# Altium PCB MX3.PcbDoc
Units mil, origin at the board's own origin, x right, y up, seen from the top; angles counter-clockwise.
Board outline 1580 x 835 mil, 2 copper layers (Top Layer, Bottom Layer), stack 12.8 mil thick; 39 components, 24 nets, 110 pads, 73 vias.
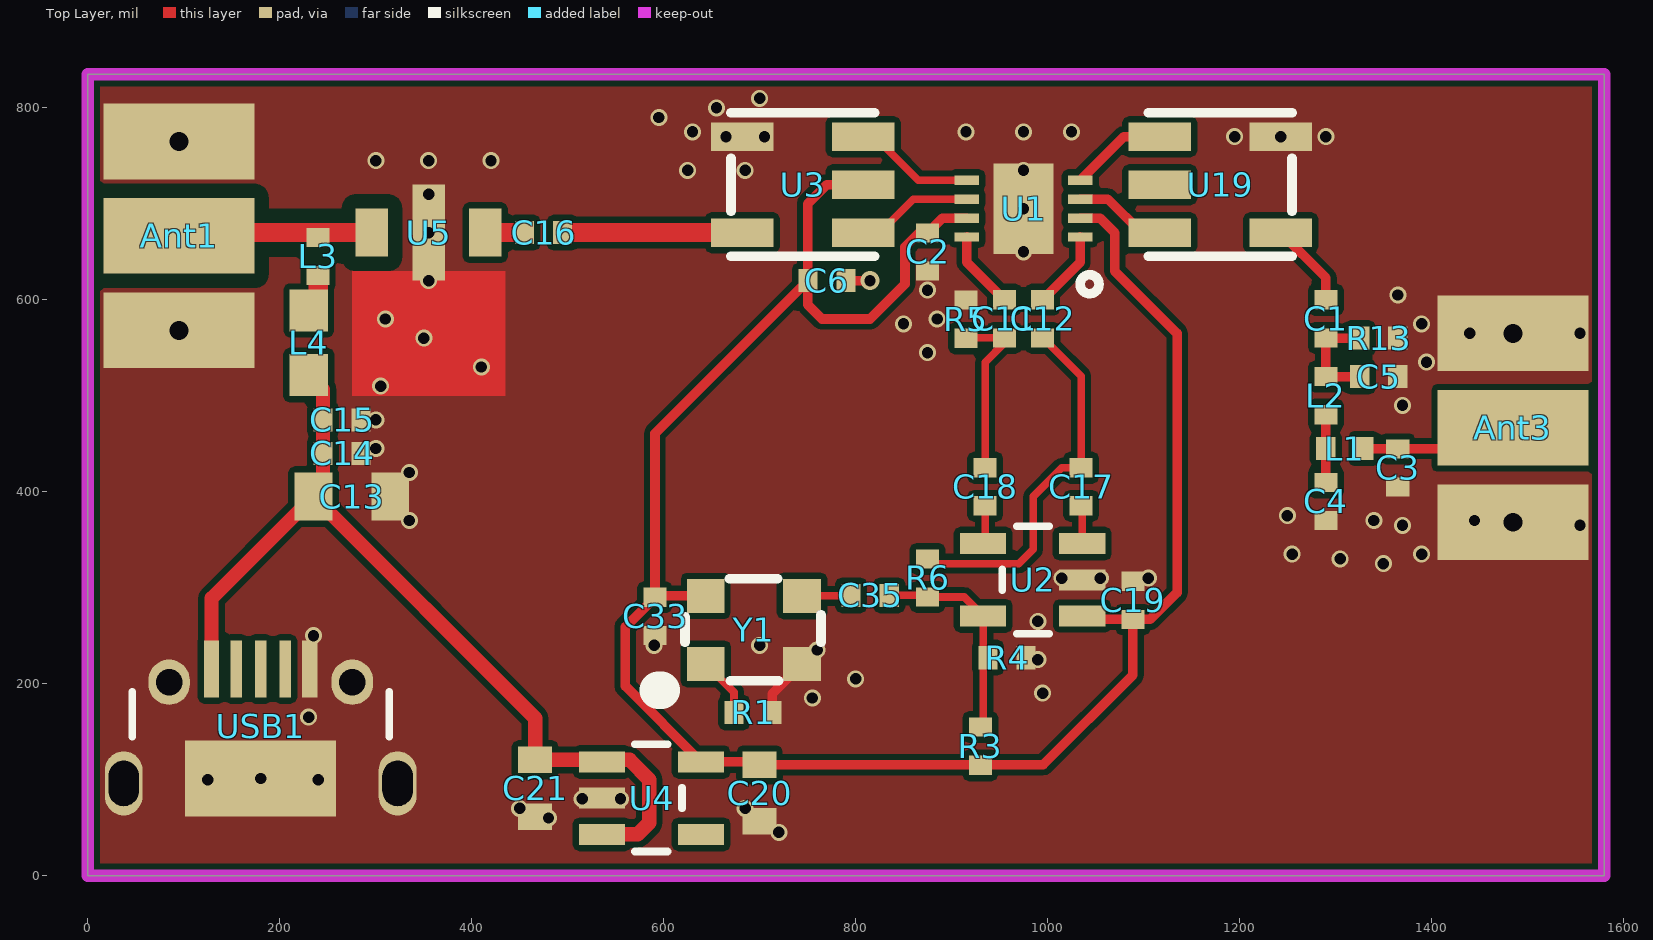
[diagram p0: Top Layer view]
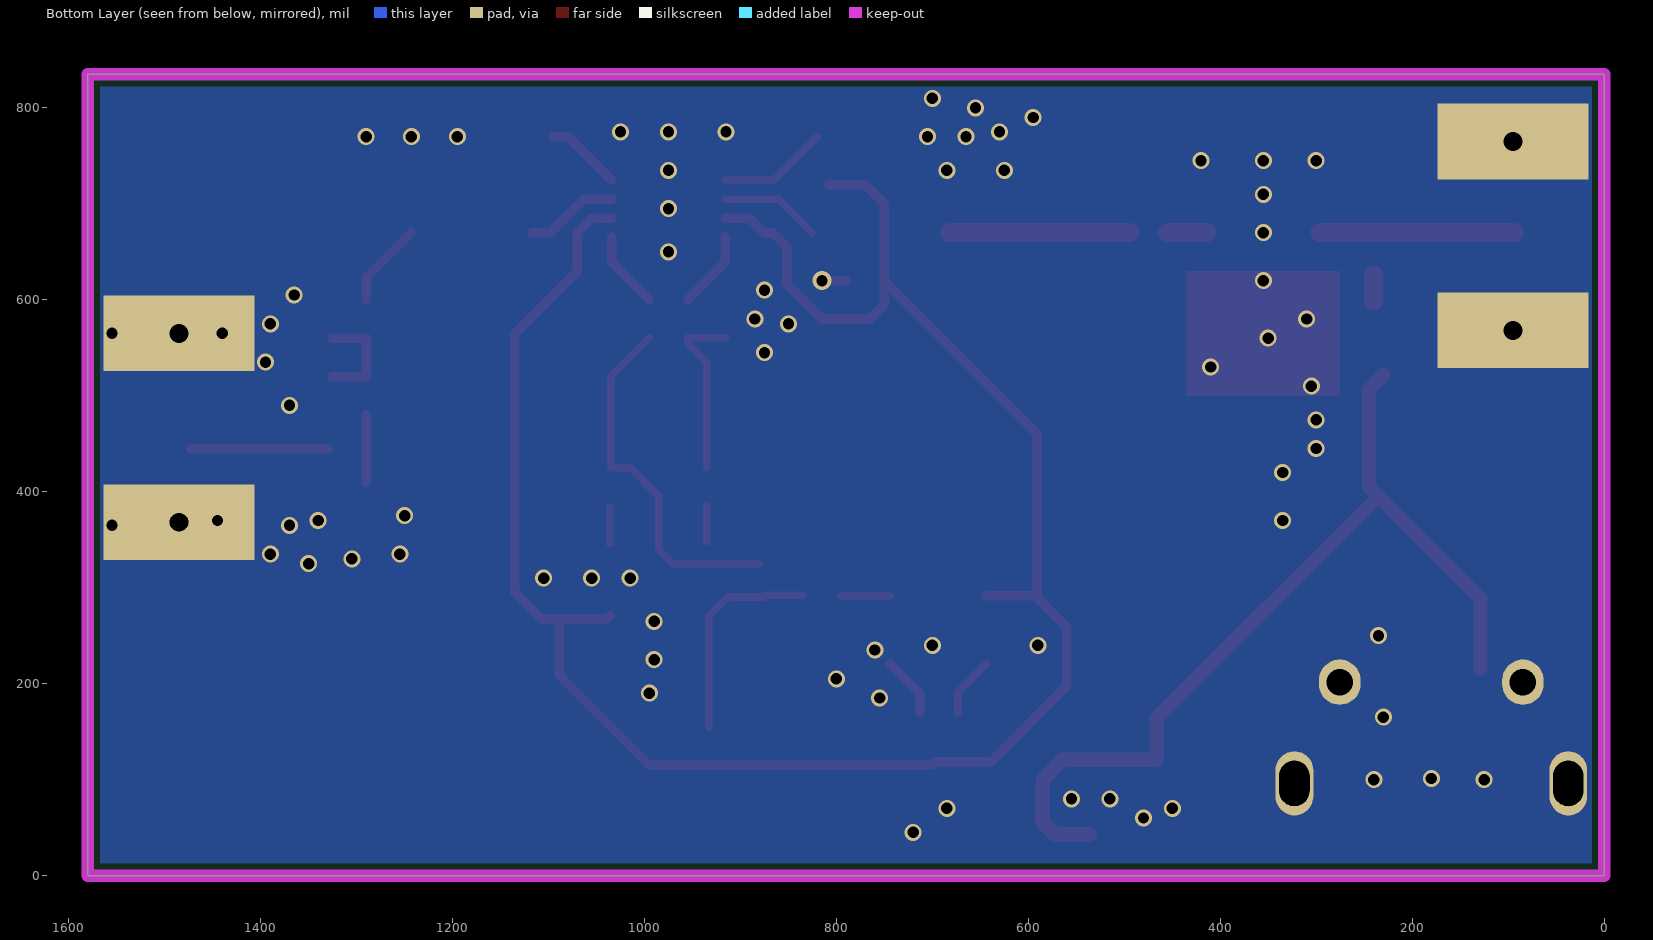
[diagram p1: Bottom Layer view, seen from below]

## Layer stack, top to bottom
Top Solder: solder mask 0.4, Solder Resist, Dk 3.8
Top Layer: signal copper 1.4
Dielectric 1: core 10, Dk 4.2
Bottom Layer: signal copper 1.4
Bottom Solder: solder mask 0.4, Solder Resist, Dk 3.8

## Board outline
0,0 0,835 1580,835 1580,0

## Design rules (kind name [scope] priority, off if disabled: settings)
Clearance 50R [InNetClass('50R') vs InPolygon] p1: gap=15 ignorepadtopadclearanceinfootprint=FALSE
Clearance [All] p2: gap=6 ignorepadtopadclearanceinfootprint=FALSE except(0: Arc-Hole Track-Hole SMDPad-Hole THPad-Hole Via-Hole Fill-Hole Poly-Hole Region-Hole Text-Hole)
DiffPairsRouting [All] p1: maxlimit=10 minlimit=10 mostfreqgap=10 toplayer_minwidth=5.98 toplayer_maxwidth=15 toplayer_prefwidth=15 bottomlayer_minwidth=5.98 bottomlayer_maxwidth=15 bottomlayer_prefwidth=15 maxuncoupledlength=500
MinimumSolderMaskSliver [All] p1 off: minsoldermaskwidth=10
PlaneClearance [All] p1: clearance=15
PlaneConnect [All] p1: planeconnectstyle=Direct reliefexpansion=20 reliefentries=4 reliefconductorwidth=10 reliefairgap=10
PolygonConnect [All] p1: connectstyle=Direct reliefconductorwidth=10 reliefentries=4 polygonreliefangle="90 Angle" airgapwidth=10
RoomDefinition MX [InComponentClass('MX')] p1 off: confinementstyle=ConfineIn formatcopy=TRUE lockcomponents=FALSE outline 1399.04,1282.09 10549.04,1282.09 10549.04,1632.09 1399.04,1632.09
RoutingVias [All] p1: holewidth=12 width=20 viastyle="Through Hole" minholewidth=11.81 minwidth=19.68 maxholewidth=28 maxwidth=50
SilkToBoardRegionClearance [All] p1 off:
SilkToSilkClearance [All] p1 off: silktosilkclearance=10
SilkToSolderMaskClearance [IsPad] p1 off: minsilkscreentomaskgap=10 clearancetoexposedcopper=TRUE
SolderMaskExpansion [All] p1: expansion=4
Width [All] p1: maxlimit=60 minlimit=6 preferedwidth=6
23 further rules are at their usual default settings.

## Classes and differential pairs
net class 50R: NetAnt1_1

## Components (designator, comment, footprint, x,y, rotation, side; value= is the part's Value field where it differs from the comment)
Ant1 "Antenna" SMA 95,765 r270 top
Ant3 "Antenna" SMA 1485,565 r270 top
C1 "100pF" 0402 1290,580 r90 top
C2 "100pF" 0402 875,650 r270 top
C3 "100pF" 0402 1365,425 r270 top
C4 "100pF" 0402 1290,390 r270 top
C5 "100pF" 0402 1345,520 r0 top
C6 "100pF" 0402 770,620 r0 top
C11 "1nF" 0402 955,580 r90 top
C12 "1nF" 0402 995,580 r90 top
C13 "12nF" 0805 275,395 r180 top
C14 "1nF" 0402 265,440 r180 top
C15 "100pF" 0402 265,475 r180 top
C16 "1nF" 0402 475,670 r180 top
C17 "1nF" 0402 1035,405 r90 top
C18 "1nF" 0402 935,405 r90 top
C19 "0.1uF" 0402 1089,287 r270 top
C20 "4.7uF" 0603L 700,86 r90 top
C21 "4.7uF" 0603L 466,91 r90 top
C33 "0.1uF" 0402 591,270 r90 top
C35 "0.1uF" 0402 815,292 r0 top
L1 "Inductor" 0402 1310,445 r180 top value=10nH
L2 "Inductor" 0402 1290,500 r90 top value=10nH
L3 "Inductor" 0402 240,645 r90 top value=10nH
L4 "Inductor" 0603 230,555 r90 top value=10nH
R1 "NC" 0402 693,170 r0 top
R3 "10k" 0402 930,135 r270 top
R4 "10k" 0402 958,227 r180 top
R5 "0R/NC" 0402 915,580 r270 top
R6 "NC" 0402 875,310 r90 top
R13 "NC" 0402 1345,560 r0 top
U1 "LT5560" LT5560 975,695 r180 top
U2 "SN65LVDS1" SOT23-5 985,308 r90 top
U3 "TCM1-13MX+" TCM-13M+ 745,720 r270 top
U4 "LP5907" SOT23-5 587,81 r270 top
U5 "AMP-SOT89" SOT-89 355,670 r180 top
U19 "TCM1-13MX+" TCM-13M+ 1180,720 r90 top
USB1 "USB Micro Type B" MICRO-YZX 180,-15 r0 top
Y1 "OSC_40M" TXC_7Q 694.04,256.09 r0 top

## Footprints (in the part's own frame and the unit in brackets; to place one, negate y for a bottom-side part, rotate by r counter-clockwise, add the part's x,y. Pads: shape width x height; smd on the part's side, far side on the other; paste and mask are expansions set on the pad)
0402 [mil] "0402-RES"
  rect 20x24 smd: 1(-19.68,0) 2(20,0)
0603 [mil] "0603-RES"
  rect 44x40 smd: 1(-33.46,0) 2(34,0)
  body extent -31,-16 31,16, height 31
0603L [mm]
  rect 0.7x0.9 smd: 1(-0.75,0) 2(0.75,0)
  body extent -0.8,-0.4 0.8,0.4, height 0.8
0805 [mil]
  rect 39.37x50 smd: 1(-40,0) 2(40,0)
  body extent -50,-30 50,30, height 31
LT5560 [mm]
  rect 1.6x2.4 smd: 0(0,0)
  rect 0.65x0.25 smd: 1(-1.5,0.75) 2(-1.5,0.25) 3(-1.5,-0.25) 4(-1.5,-0.75) 5(1.5,-0.75) 6(1.5,-0.25) 7(1.5,0.25) 8(1.5,0.75)
  silkscreen extent -2,1.75 -1.5,2.25, body extent -1.5,-1.5 1.5,1.5, height 0.75
MICRO-YZX [mm]
  rect 0.4x1.5 smd: 1(-1.3,5.85) 5(1.3,5.85)
  rect 0.3x1.5 smd: 2(-0.65,5.85) 3(0,5.85) 4(0.65,5.85)
  oval 1x1.7 hole 0.8 slot 1.2 at 90 deg: 5(-3.625,2.82) 5(3.625,2.82)
  oval 1.1x1.2 hole 0.7: 5(-2.425,5.5) 5(2.425,5.5)
  rect 4x2 smd: 5(0,2.95)
  silkscreen extent -3.4,4.05 3.4,5.25, body extent -4.02,0.33 3.98,5.93, height 2.6
SMA [mm]
  rect 2x4 smd: 1(2.5,0)
  rect 2x4 hole 0.5: GND(0,0) GND(5,0)
SOT23-5 [mil] "SOT23-5"
  rect 22x48 smd: 1(-37.4,-51.19) 2(0,-51.19) 3(38,-51.19) 4(38,52) 5(-37.4,52)
  silkscreen extent -56,-17 56,32, body extent -57,-55 57,55, height 47
SOT-89 [mil]
  rect 34x50 smd: 1(-59.06,0) 3(59.06,0)
  rect 34x100 smd: 2(0,0)
  Top Layer region: -80,40 80,40 80,170 -80,170
  body extent -89,-22 89,147, height 59
TCM-13M+ [mm]
  rect 0.75x1.65 smd: 1(-1.27,1.6) 2(0,1.6) 3(1.27,1.6) 4(1.27,-1.6) 5(-1.27,-1.6)
  silkscreen extent -1.9,-1.9 1.9,1.9
TXC_7Q [mm]
  rect 1x0.9 smd: 1(-1.275,-0.9) 2(1.275,-0.9) 3(1.275,0.9) 4(-1.275,0.9)
  silkscreen extent -2.52,-1.6 1.78,1.35

## Part data
C1 C2 C3 C4 C5 C6 C11 C12 C13 C14 C15 C16 C17 C18 C19 C33 C35: library part CAP0402-CAP, "<b>Capacitor</b> / Standard 0603 ceramic capacitor, and 0.1\" leaded capacitor.", PARTNO=CC0402ZRY5V7BB104
C20 C21: library part Cap, "Capacitor", LatestRevisionDate=17-Jul-2002, LatestRevisionNote="Re-released for DXP Platform.", PackageDescription="Radial Cap, Thru-Hole; 2 Leads; 0.3 in Pin Spacing", PackageReference=RAD-0.3, Published=8-Jun-2000, Publisher="Altium Limited"
R1 R3 R4 R5 R6 R13: library part Res2, "Resistor", LatestRevisionDate=17-Jul-2002, LatestRevisionNote="Re-released for DXP Platform.", PackageDescription="Axial Device, Thru-Hole; 2 Leads; 0.4 in Pin Spacing", PackageReference=AXIAL-0.4, Published=8-Jun-2000, Publisher="Altium Limited"
U3 U19: library part TCM-63AX+
USB1: library part USB_Micro_TypeB, "Connector SMD USB Micro Type B middle mount", Manufacturer 1="Molex Inc", Manufacturer Part Number 1=47491-0001, Package / Case=SMD, Supplier Part Number 1=WM17142CT-ND, SCDType=undef, Supplier 1=Digi-Key
L1 L2 L3 L4: Code_IEC=1005, Code_JEITA=0402, LatestRevisionDate=29-May-2009, LatestRevisionNote="IPC-7351 Footprint Added.", PackageDescription="Chip Inductor", PackageReference=0402-A, Published=8-Jun-2000, Publisher="Altium Limited"

## Via types
v1: diameter 17.72, hole 11.81, Top Layer to Bottom Layer, 72 vias
v2: diameter 19.68, hole 11.81, Top Layer to Bottom Layer, 1 vias

## Nets (pads, with @x,y where several pads share a name; then routed paths per layer and width w, separated by ;. In a path a pad name is that pad's centre, name@x,y a point inside that pad or via, vN(x,y) a via of type N, cw(c..) or ccw(c..) an arc to the next point about the centre after c; other vN are vias at no path point)
3.3: C2.1 C6.1 C19.2 C20.2 C33.2 R3.2 U1.2 U1.7 U2.1 U3.2 U4.5 Y1.4 | length 2175.8
  Top Layer w10: Y1.4 592.52,291.52 C33.2 ; C20.2@697.13,118.4 U4.5 560,197.4 560,259 C33.2 ; C20.2 995.53,115.53 1089,209 C19.2 ; U3.2 770,720 750.32,700.32 C6.1 ; U1.7 890.47,685.16 C2.1 866.16,669.68 851.47,655 851.47,616.47 815,580 765,580 750.32,594.68 C6.1 ; U1.2 1054.84,685.16 1070,670 1070,630 1135,565 1135,295 1107,267 C19.2 ; U2.1 1039.78,267 C19.2 ; C33.2 591,460.68 C6.1
5V: C13.2 C14.2 C15.2 C21.2 L4.1 U4.1 U4.3 USB1.1 | length 957.4
  Top Layer w15: USB1.1 128.82,288.82 C13.2 ; L4.1 245,506.54 C15.2 C14.2 245,405 C13.2 ; U4.3 573,43 585,55 585,100 564.47,120.53 C21.2 466,164 C13.2
GND: Ant1.GND Ant3.GND C2.2 C3.2 C4.2 C5.2 C6.2 C13.1 C14.1 C15.1 C19.1 C20.1 C21.1 C33.1 R1.2 R4.1 R5.1 R13.2 U1.0 U2.2 U3.5 U4.2 U5.2 U19.4 USB1.5 Y1.2 | length 88.6
  Top Layer w10: R1.2 713,189.42 Y1.2 ; C6.2 v2(815,620)
  other v1: 720,45 480,60 450,70 685,70 515,80 555,80 125,100 240,100 180,101.14 230,165 755,185 995,190 800,205 990,225 760,235 590,240 700,240 235,250 990,265 1015,310 1055,310 1105,310 1350,325 1305,330 1255,335 1390,335 1370,365 1555,365 335,370 1340,370 1445,370 1250,375 335,420 300,445 300,475 1370,490 305,510 410,530 1395,535 875,545 350,560 1440,565 1555,565 850,575 1390,575 310,580 885,580 1365,605 875,610 355,620 975,650 355,670 975,695 355,710 625,735 685,735 975,735 300,745 355,745 420,745 665,770 705,770 1195,770 1242.99,770 1290,770 630,775 915,775 975,775 1025,775 595,790 655,800 700,810
LO_N: C11.2 U1.8 | length 81.6
  Top Layer w10: U1.8 915.94,639.06 C11.2
LO_P: C12.2 U1.1 | length 81.6
  Top Layer w10: C12.2 1034.06,639.06 U1.1
NetAnt1_1: Ant1.1 L3.2 U5.3 | length 202.5
  Top Layer w20: Ant1.1@93.43,670 U5.3
NetAnt3_1: Ant3.1 C3.1 L1.1 | length 143.7
  Top Layer w10: L1.1 Ant3.1@1473.43,445
NetC1_1: C1.1 C5.1 L2.2 R13.1 | length 110.6
  Top Layer w10: C1.1 L2.2 C5.1 ; C1.1@1290.32,560 R13.1
NetC1_2: C1.2 U19.5 | length 89.5
  Top Layer w10: U19.5 1290,622.99 C1.2
NetC4_1: C4.1 L1.2 L2.1 | length 70.6
  Top Layer w10: C4.1 L1.2 L2.1
NetC11_1: C11.1 C18.2 R5.2 | length 183.3
  Top Layer w8: R5.2@915.32,560.32 C11.1 955,555 935,535 C18.2
NetC12_1: C12.1 C17.2 R6.2 | length 380.5
  Top Layer w8: R6.2@880,325 970,325 985,340 985,395 1015,425 C17.2 1035,520.32 C12.1
NetC16_1: C16.1 U3.4 | length 187.3
  Top Layer w20: C16.1 U3.4
NetC16_2: C16.2 U5.1 | length 40.9
  Top Layer w20: U5.1 C16.2
NetC17_1: C17.1 U2.3 | length 38.1
  Top Layer w8: U2.3 C17.1@1036.19,384.13
NetC18_1: C18.1 U2.4 | length 37.3
  Top Layer w8: U2.4@935,348 C18.1
NetC35_1: C35.1 Y1.3 | length 50.6
  Top Layer w8: Y1.3 C35.1@794.83,291.52
NetC35_2: C35.2 R3.1 R4.2 R6.1 U2.5 | length 220.4
  Top Layer w8: C35.2 R6.1@873.32,292 ; R6.1 913.28,290.32 U2.5 R3.1@933,154.68
NetL3_1: L3.1 L4.2 | length 26.3
  Top Layer w20: L4.2@240,599 L3.1
NetR1_1: R1.1 Y1.1 | length 62.9
  Top Layer w8: Y1.1 673.32,191.18 R1.1
NetU1_3: U1.3 U19.1 | length 97.4
  Top Layer w10: U1.3 1062.92,704.84 1097.76,670 U19.1
NetU1_4: U1.4 U19.3 | length 79.8
  Top Layer w10: U1.4 1079.53,770 U19.3@1095,770
NetU1_5: U1.5 U3.1 | length 114.8
  Top Layer w8: U3.1@820,770 865.47,724.53 U1.5
NetU1_6: U1.6 U3.3 | length 105.1
  Top Layer w8: U3.3@825.32,670 860.16,704.84 U1.6
pads on no net: U4.4 U19.2 USB1.2 USB1.3 USB1.4

## Polygon pours and split planes (outlines as drawn)
GND on Bottom Layer "GND_L02_P000" (solid, remove dead copper, pour order 0): 0,0 1580,0 1580,835 0,835
GND on Top Layer "GND_L01_P002" (solid, remove dead copper, pour order 2): 0,0 1580,0 1580,835 0,835

## Keep-outs
Keep-Out Layer:
  the board outline again, w13